# Altium PCB LED_Chaser.PcbDoc
Units mil, origin at the board's own origin, x right, y up, seen from the top; angles counter-clockwise.
Board outline 2119.47 x 2509.47 mil, 2 copper layers (Top Layer, Bottom Layer); 19 components, 17 nets, 58 pads, 4 vias.
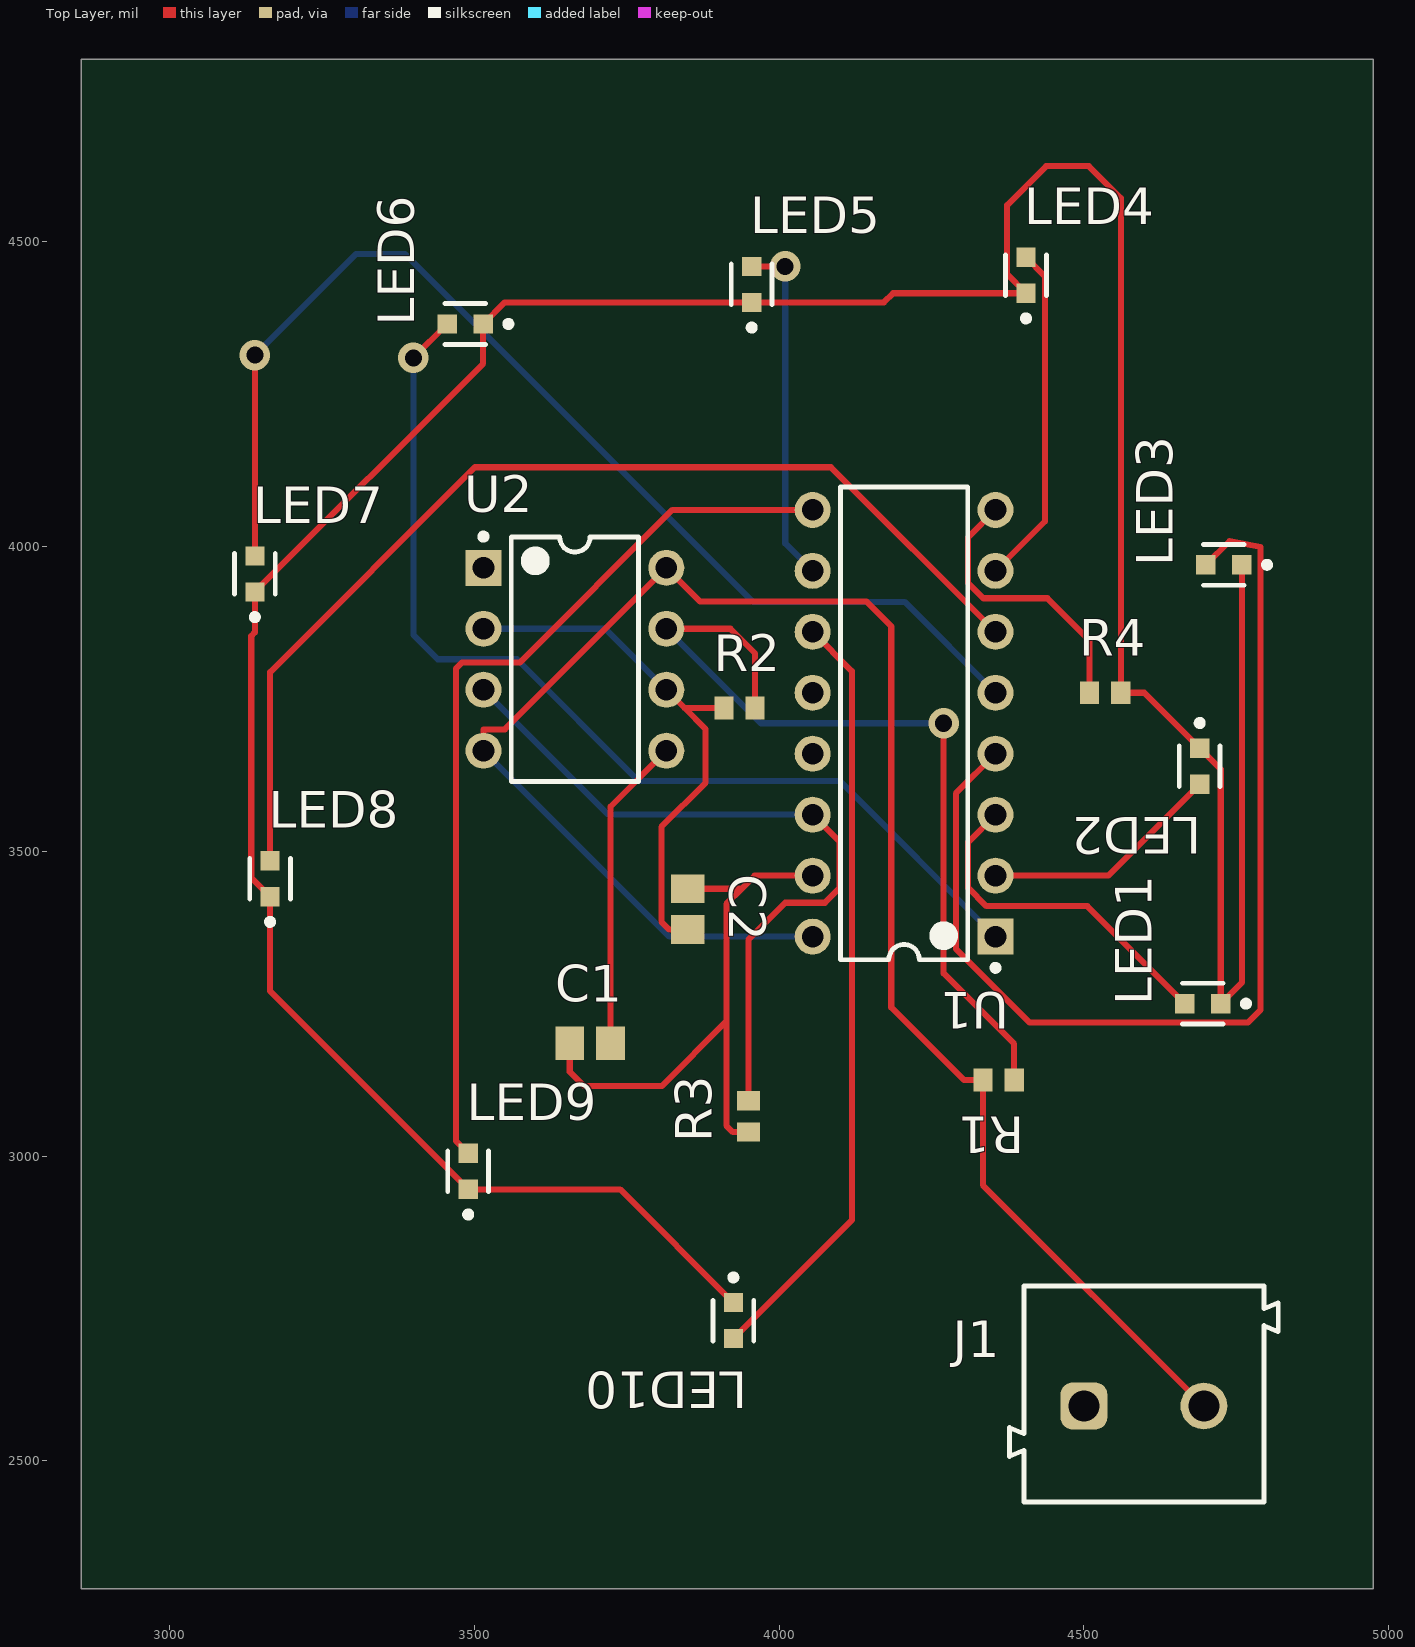
[diagram p0: Top Layer view]
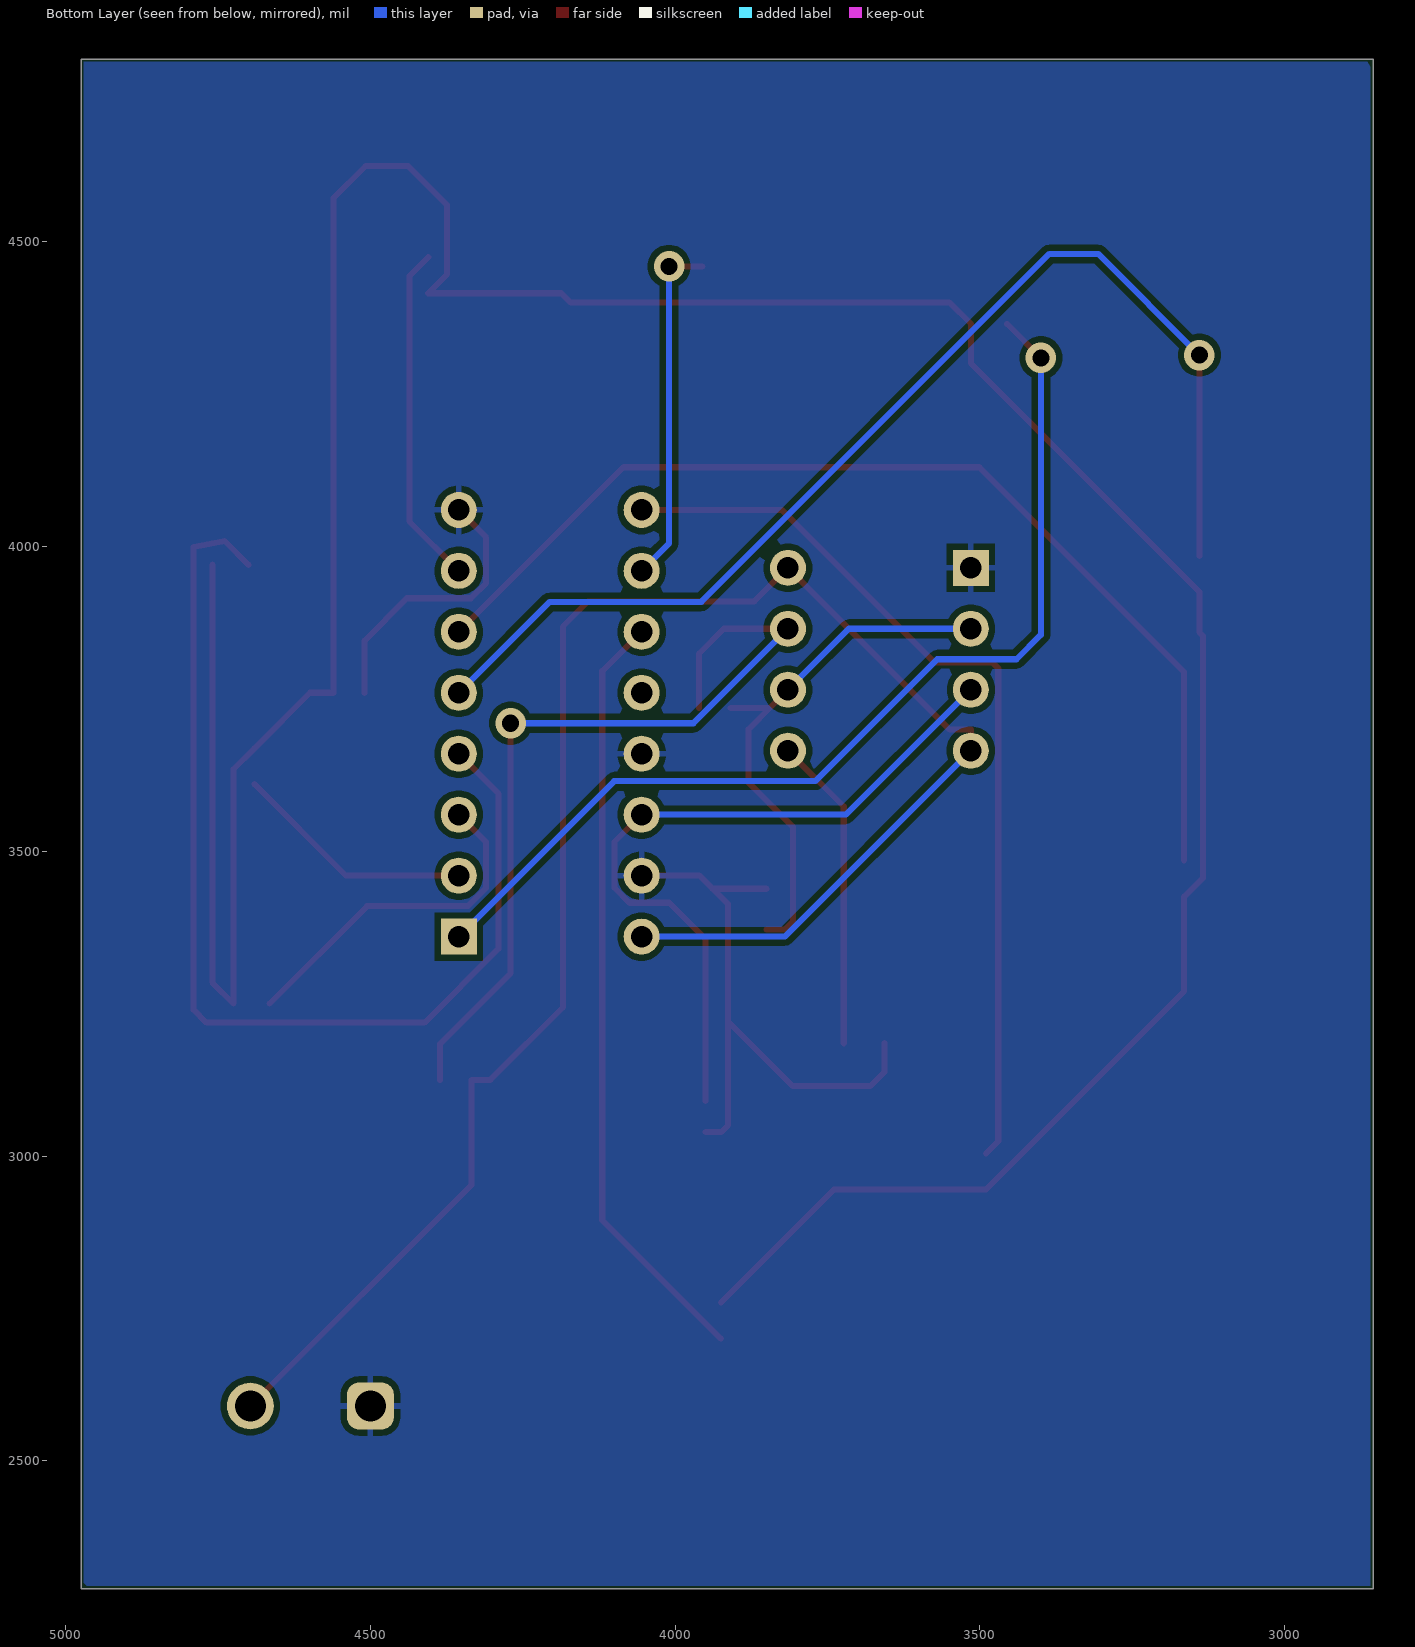
[diagram p1: Bottom Layer view, seen from below]
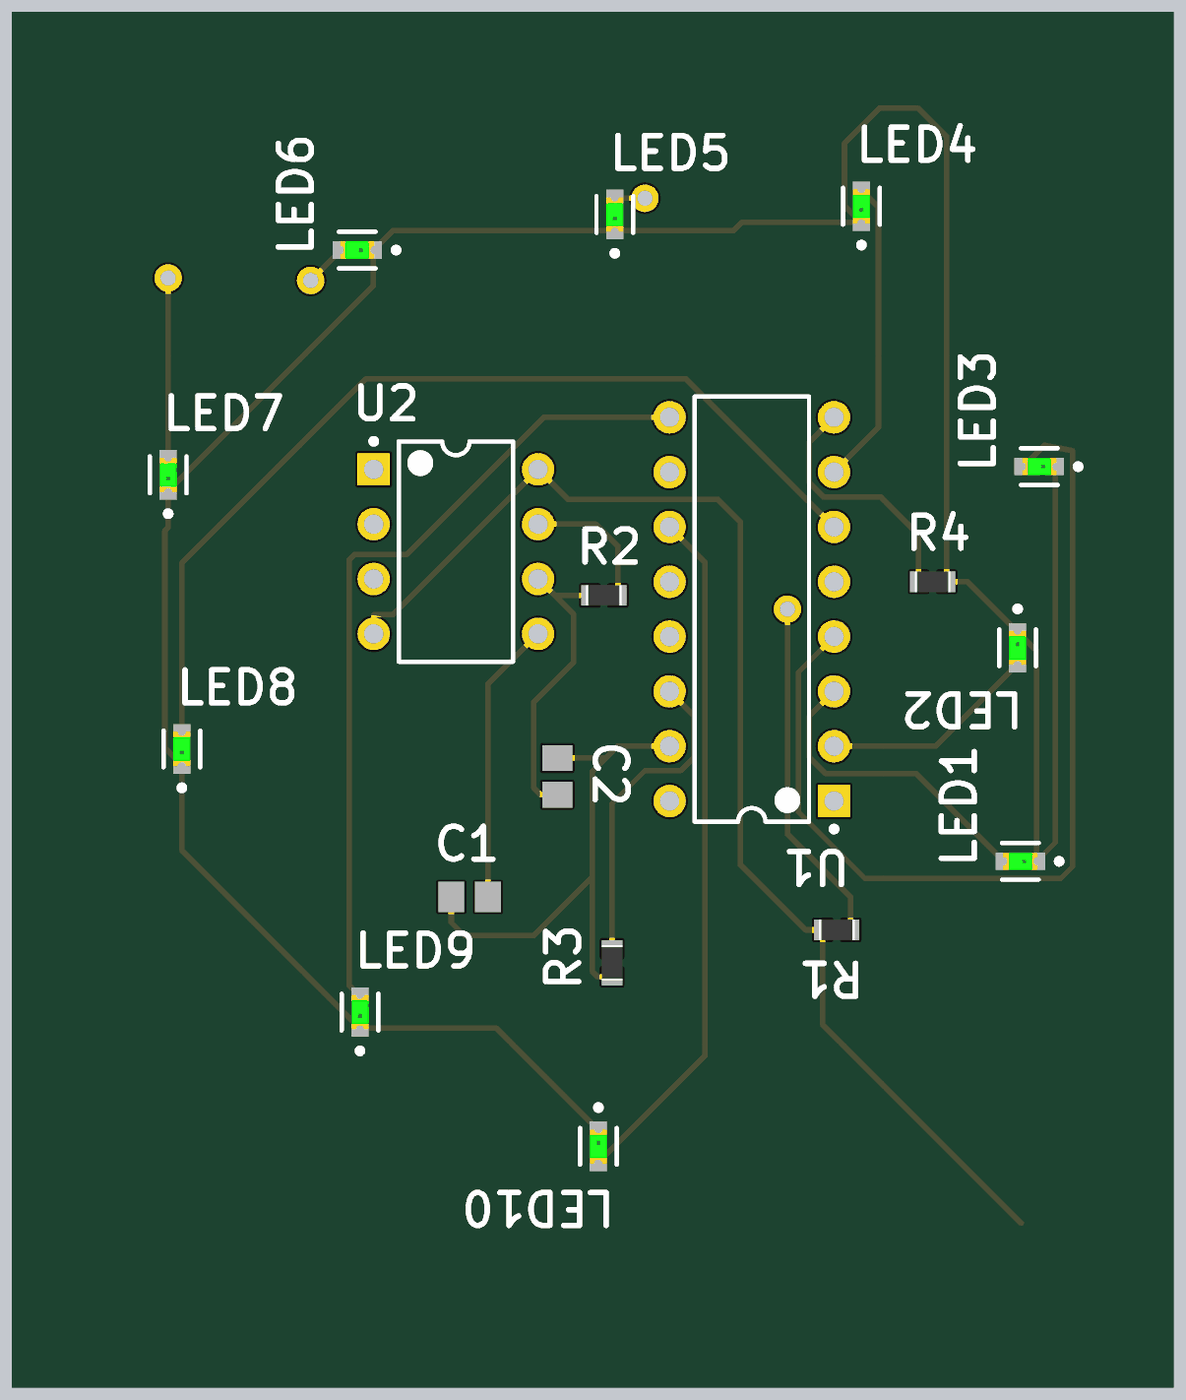
[diagram p2: 3D render of the assembled board from above, using the file's embedded part models]

## Layer stack, top to bottom
Top Solder: solder mask 0.4, Solder Resist, Dk 3.5
Top Layer: signal copper 1.4
Dielectric 1: dielectric 12.6, FR-4, Dk 4.8
Bottom Layer: signal copper 1.4
Bottom Solder: solder mask 0.4, Solder Resist, Dk 3.5

## Board outline
2855,2290 4974.47,2290 4974.47,4799.47 2855,4799.47

## Design rules (kind name [scope] priority, off if disabled: settings)
Clearance [All] p1: gap=10 ignorepadtopadclearanceinfootprint=FALSE
PolygonConnect [All] p1: connectstyle=Relief reliefconductorwidth=10 reliefentries=4 polygonreliefangle="90 Angle" airgapwidth=10
RoutingVias [All] p1: holewidth=28 width=50 viastyle="Through Hole" minholewidth=28 minwidth=50 maxholewidth=28 maxwidth=50
SolderMaskExpansion [All] p1: expansion=4 istentingtop=FALSE
SupplyNets "Schematic Supply Nets" [InNet('GND')] p1: voltage=0.000
Width [All] p1: maxlimit=10 minlimit=10 preferedwidth=10
30 further rules are at their usual default settings.

## Classes and differential pairs
component class "MIni Project LED Chaser": C1 C2 J1 R1 R2 R3 R4 R5

## Components (designator, comment, footprint, x,y, rotation, side; value= is the part's Value field where it differs from the comment)
C1 "GRM21BF51C106ZE15L" CAPC2013X135X45NL10T25 3690,3185 r0 top
C2 "GRM21BF51C106ZE15L" CAPC2013X135X45NL10T25 3850,3405 r270 top
J1 "691101710002" 691101710002 54598.43,52609.69 r0 top
LED1 "" FP-LTST-C190GKT-MFG 4695,3250 r180 top
LED2 "" FP-LTST-C190GKT-MFG 4690,3639.53 r270 top
LED3 "" FP-LTST-C190GKT-MFG 4729.53,3970 r180 top
LED4 "" FP-LTST-C190GKT-MFG 4405,4445 r90 top
LED5 "" FP-LTST-C190GKT-MFG 3955,4430 r90 top
LED6 "" FP-LTST-C190GKT-MFG 3485,4365 r180 top
LED7 "" FP-LTST-C190GKT-MFG 3140,3955 r90 top
LED8 "" FP-LTST-C190GKT-MFG 3165,3455 r90 top
LED9 "" FP-LTST-C190GKT-MFG 3490,2975 r90 top
LED10 "" FP-LTST-C190GKT-MFG 3925,2730 r270 top
R1 "CRCW060310K0FKEA" RESC1609X50X30NL8T20 4360,3125 r180 top
R2 "CRCW060310K0FKEA" RESC1609X50X30NL8T20 3935,3735 r0 top
R3 "CRCW060310K0FKEA" RESC1609X50X30NL8T20 3950,3065 r90 top
R4 "CRCW060310K0FKEA" RESC1609X50X30NL8T20 4535,3760 r0 top
U1 "CD74HC4017E" N0016A 4205,3710 r180 top
U2 "NE555P" P0008A 3665,3815 r0 top

## Footprints (in the part's own frame and the unit in brackets; to place one, negate y for a bottom-side part, rotate by r counter-clockwise, add the part's x,y. Pads: shape width x height; smd on the part's side, far side on the other; paste and mask are expansions set on the pad)
691101710002 [mm] "5,00mm - modular - blue - Horizontal entry with pressure clamp - 12,6mm height - 02p"
  rrect50% 1.95x1.95 hole 1.3: 1(-1272.5,-1270.5)
  round 1.95 hole 1.3: 2(-1267.5,-1270.5)
  silkscreen extent -1275.6,-1274.5 -1264.4,-1265.5, body extent -1275.6,-1274.5 -1264.4,-1265.5, height 12.65
CAPC2013X135X45NL10T25 [mm] "Chip Capacitor, 2-Leads, Body 2.00x1.25mm, IPC Medium Density"
  rect 1.2x1.4 smd: 1(-0.85,0) 2(0.85,0)
  body extent -1.05,-0.67 1.05,0.67, height 1.35
FP-LTST-C190GKT-MFG [mm]
  rect 0.8x0.8 smd paste+0 mask+0: 1(-0.75,0) 2(0.75,0)
  silkscreen extent -1.92,-0.85 0.85,0.85, body extent -1.25,-0.55 1.25,0.55, height 0.25
N0016A [mm] "DIP, 16-Leads, Body 19.7x6.6mm, Pitch 2.54mm"
  rect 1.5x1.5 hole 0.9: 1(-3.81,8.89)
  round 1.5 hole 0.9: 2(-3.81,6.35) 3(-3.81,3.81) 4(-3.81,1.27) 5(-3.81,-1.27) 6(-3.81,-3.81) 7(-3.81,-6.35) 8(-3.81,-8.89) 9(3.81,-8.89) 10(3.81,-6.35) 11(3.81,-3.81) 12(3.81,-1.27) 13(3.81,1.27) 14(3.81,3.81) 15(3.81,6.35) 16(3.81,8.89)
  silkscreen extent -3.94,-9.85 2.65,10.31, body extent -3.95,-9.85 3.95,9.85, height 5.08
P0008A [mm] "DIP, 8-Leads, Body 10.15x6.6mm, Pitch 2.54mm"
  rect 1.5x1.5 hole 0.9: 1(-3.81,3.81)
  round 1.5 hole 0.9: 2(-3.81,1.27) 3(-3.81,-1.27) 4(-3.81,-3.81) 5(3.81,-3.81) 6(3.81,-1.27) 7(3.81,1.27) 8(3.81,3.81)
  silkscreen extent -3.93,-5.1 2.65,5.23, body extent -3.95,-5.07 3.95,5.07, height 5.08
RESC1609X50X30NL8T20 [mm] "Chip Resistor, 2-Leads, Body 1.65x0.95mm, IPC Medium Density"
  rect 0.8x0.95 smd: 1(-0.65,0) 2(0.65,0)
  body extent -0.82,-0.48 0.82,0.48, height 0.5

## Part data
C1 C2: library part CMP-2007-03514-1, Manufacturer=Murata, Part Number=GRM21BF51C106ZE15L
J1: library part CMP-1502-03256-2, Color=Blue, Current=16A, Max Operating Temperature=105°C, Min Operating Temperature=-40°C, Voltage=250V, Contact Material=Brass, Contact Plating=Tin, Current Rating=16A, Height=16.4mm, Housing Material=Nylon, Lead Pitch=5mm, Length=9mm, Mount="Through Hole", NexarPartId=8917704, Number of Contacts=2, Number of Levels=1, Number of Pins=2, Number of Positions Per Level=2, Packaging=Box, Pitch=5.0038mm, Plating=Steel, REACH SVHC=Unknown, RoHS=Compliant, Stripping Length=-7mm, Termination=Screw, Voltage Rating=250V, Width=11.2mm, Wire Gauge (Max)=26AWG, Wire Gauge (Min)=14AWG, Wire/Cable Gauge=26AWG
LED1 LED2 LED3 LED4 LED5 LED6 LED7 LED8 LED9 LED10: library part CMP-22017-000005-2, "LED GREEN CLEAR CHIP SMD", Case Code (Imperial)=0603, Case Code (Metric)=1608, Color=Green, Forward Current=30mA, Forward Voltage=2.1V, Lens Color=Colorless, Max Operating Temperature=85°C, Min Operating Temperature=-55°C, Package Quantity=1, Power Dissipation=100mW, Reverse Voltage=5V, Test Current=10mA, Voltage=2V, Case/Package=0603, Depth=0.8mm, Dominant Wavelength=569nm, Height=0.8mm, Illumination Color=Green, Lead Free="Lead Free", Length=1.6mm, Lens Style=Clear, Lens Transparency=Clear, Luminous Intensity=6mcd, Mount="Surface Mount", Number of Elements=1, Number of LEDs=1, Number of Pins=2, Packaging="Tape and Reel", Power Rating=100mW, Radiation Hardening=No, Viewing Angle=130°, Wavelength=565nm, Width=0.8mm
R1 R2 R3 R4: library part CMP-1666-00005-4, "Chip Resistor, 10 KOhm, +/- 1%, 100 mW, -55 to 155 degC, 0603 (1608 Metric), RoHS, Tape and Reel", Manufacturer="Vishay Semiconductor", Max Operating Temperature="155 degC", Min Operating Temperature="-55 degC", Package Quantity=5000, Voltage Rating="75 V", ComponentLink1Description="Manufacturer URL", ComponentLink1URL=http://www.vishay.com/, ComponentLink2Description=Datasheet, ComponentLink2URL=https://datasheet.ciiva.com/11809/0900766b80d98afc-11809037.pdf, DatasheetVersion=06/2012, Height="0.45 mm", Length="1.55 mm", Mounting Technology="Surface Mount", PackageDescription="2-Pin Surface Mount Device, Body 1.575 x 0.85 mm", PackageReference=0603, Packaging="Tape and Reel", REACH SVHC=Unknown, RoHSCompliant=true
U1: library part CMP-1623-00548-2, "High Speed CMOS Logic Decade Counter/Divider with 10 Decoded Outputs, N0016A, TUBE", F @ Nom Voltage(Max)(Mhz)=28, Generic Part Number=CD74HC4017, ICC @ Nom Voltage(Max)(mA)=0.08, Manufacturer="Texas Instruments", Operating Temperature Range(C)="-55 to 125", Rating=Catalog, tpd @ Nom Voltage(Max)(ns)=54, Voltage(Nom)(V)=3.3,5, Bits(#)=10, Code_JEDEC=MS-001, DatasheetVersion=SCHS200D, Function=Counter, Input Type=LVTTL/CMOS, Inputs=1, Output Drive (IOL/IOH)(Max)(mA)=5.2/-5.2, Output Type=CMOS, PackageReference=N0016A, Schmitt Trigger=No, Technology Family=HC, Type=Decade, VCC(Max)(V)=6, VCC(Min)(V)=2
U2: library part CMP-2000-04954-1, "Precision Timer, 4.5 to 16 V, 0 to 70 degC, 8-Pin DIP, Pb-Free, Tube", Manufacturer=TexasInstruments, Maximum High Level Output Current=-200mA, Maximum Low Level Output Current=200mA, Operating Supply Voltage=5, Package=8PDIP, Package Description="8-Pin Double In-line Package, Body 9.59 x 6.35 mm, Pitch 2.54 mm", Package Reference=P8, Category=Timer, Datasheet URL=http://www.ti.com/general/docs/lit/getliterature.tsp?genericPartNumber=NE555&fileType=pdf, Datasheet Version="Rev. I, 09/2014", Manufacturer URL=http://www.ti.com/, Number of Internal Timers=1, Package URL=http://www.ti.com/lit/ml/mpdi001b/mpdi001b.pdf, Packaging=Rail/Tube, Rad Hard=No, Type=Standard

## Via types
v1: diameter 50, hole 28, Top Layer to Bottom Layer, 4 vias

## Nets (pads, with @x,y where several pads share a name; then routed paths per layer and width w, separated by ;. In a path a pad name is that pad's centre, name@x,y a point inside that pad or via, vN(x,y) a via of type N, cw(c..) or ccw(c..) an arc to the next point about the centre after c; other vN are vias at no path point)
GND: C1.1 C2.1 J1.1 R3.1 R4.1 U1.8 U1.13 U1.15 U2.1 | length 1473.6
  Top Layer w10: C1.1 3656.54,3138.34 3680,3114.87 3807.46,3114.87 3913.59,3221 ; C2.1 3938.46,3438.46 ; R3.1 3924.18,3039.41 3913.59,3050 3913.59,3221 ; U1.15 3960,3460 3938.46,3438.46 ; U1.8 4310,4015 4310,3940 4335,3915 4440,3915 4509.41,3845.59 R4.1 ; 3913.59,3221 3913.59,3413.59 3938.46,3438.46
NetC1_2: C1.2 U2.5 | length 517.9
  Top Layer w10: C1.2 3723.46,3573.46 U2.5
NetC2_2: C2.2 R2.1 U2.2 U2.6 | length 891.5
  Top Layer w10: U2.6 3845,3735 ; C2.2 3820,3371.54 3807,3384.54 3807,3540 3879.53,3612.53 3879.53,3700.47 3845,3735 ; R2.1 3845,3735
  Bottom Layer w10: U2.2 3715,3865 U2.6
NetJ1_2: J1.2 R1.2 U1.16 U2.4 U2.8 | length 3029.7
  Top Layer w10: U2.4 3515,3700 3550,3700 U2.8 3870,3910 4143,3910 4184,3869 4184,3244 4303,3125 R1.2 4334.41,2952.44 J1.2
  Bottom Layer w10: U2.4 3820,3360 U1.16
NetLED1_1: LED1.1 LED2.1 LED3.1 LED4.1 LED5.1 LED6.1 LED7.1 LED8.1 LED9.1 LED10.1 R4.2 | length 5686.4
  Top Layer w10: LED10.1 3739.06,2945.47 LED9.1 3165,3270.47 LED8.1 3134,3456.47 3134,3853 3140,3859 LED7.1 3514.53,4300 LED6.1 3550,4400.47 LED5.1 4172,4400.47 4187,4415.47 LED4.1 4374,4446.47 4374,4560 4438,4624 4508,4624 4560.59,4571.41 R4.2 4599.06,3760 LED2.1 4724.53,3634.53 LED1.1 4759.06,3284.53 LED3.1
NetLED1_2: LED1.2 U1.3 | length 572.8
  Top Layer w10: U1.3 4310,3515 4310,3440 4340,3410 4505.47,3410 LED1.2
NetLED2_2: LED2.2 U1.2 | length 397.1
  Top Layer w10: U1.2 4540,3460 LED2.2
NetLED3_2: LED3.2 U1.4 | length 1771.9
  Top Layer w10: U1.4 4290,3595 4290,3340 4411,3219 4769,3219 4790,3240 4790,3999 4739,4009 LED3.2
NetLED4_2: LED4.2 U1.7 | length 560.9
  Top Layer w10: U1.7 4436,4041 4436,4443.53 LED4.2
NetLED5_2: LED5.2 U1.10 | length 573.2
  Top Layer w10: LED5.2 v1(4010,4459.53)
  Bottom Layer w10: v1(4010,4459.53) 4010,4005 U1.10
NetLED6_2: LED6.2 U1.1 | length 1693
  Top Layer w10: v1(3400,4309.53) LED6.2
  Bottom Layer w10: v1(3400,4309.53) 3400,3855 3440,3815 3570,3815 3770,3615 4100,3615 U1.1
NetLED7_2: LED7.2 U1.5 | length 1911.5
  Top Layer w10: LED7.2 v1(3140,4314)
  Bottom Layer w10: v1(3140,4314) 3306,4480 3386,4480 3957,3909 4206,3909 U1.5
NetLED8_2: LED8.2 U1.6 | length 1750.5
  Top Layer w10: LED8.2 3165,3794 3501,4130 4085,4130 U1.6
NetLED9_2: LED9.2 U1.9 | length 1496.5
  Top Layer w10: LED9.2 3470,3024.53 3470,3800 3480,3810 3575,3810 3825,4060 U1.9
NetLED10_2: LED10.2 U1.11 | length 1266.8
  Top Layer w10: LED10.2 4119.53,2895 4119.53,3795.47 U1.11
NetR1_1: R1.1 R2.2 U2.7 | length 1403.9
  Top Layer w10: U2.7 3920,3865 3960.59,3824.41 R2.2 ; v1(4270,3710) 4270,3299.59 4385.59,3184 R1.1
  Bottom Layer w10: U2.7 3970,3710 v1(4270,3710)
NetR3_2: R3.2 U1.14 U2.3 | length 1212.8
  Top Layer w10: R3.2 3950,3355.47 4010,3415.47 4075,3415.47 4099.53,3440 4099.53,3515.47 U1.14
  Bottom Layer w10: U2.3 3720,3560 U1.14
pads on no net: U1.12

## Polygon pours and split planes (outlines as drawn)
GND on Bottom Layer "GND_L02_P000" (solid, pour order 0): 2860,4800 2865,4795 4970,4795 4970,2300 4965,2295 2860,2295 2860,4790